# EAGLE board lightSensor (EAGLE 6.2)
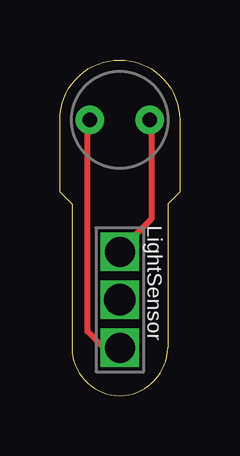
[diagram p0: board, top side]
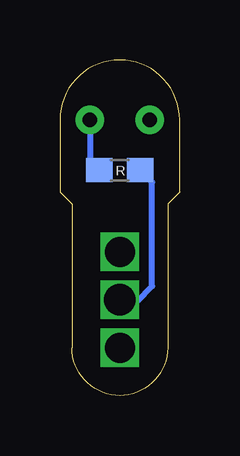
[diagram p1: board, bottom side, seen from below]

Size 5 x 14 mm. Coordinates in mm from the lower left corner, seen from the top.
Outline: 2.5,0 arc90 4.5,2 4.5,8 5,8.5 5,11.5 arc90 2.5,14 arc90 0,11.5 0,8.5 0.5,8 0.5,2 arc90 2.5,0
Copper layers (1*16): Top 0.035mm / dielectric 1.5mm / Bottom 0.035mm
Design rules: minimum track width 10mil, minimum drill 24mil, track to track 8mil, track to pad 8mil, pad to pad 8mil, via to via 8mil, smd to smd 8mil, copper to edge 40mil, drill to drill 8mil, minimum pad ring 5mil, minimum via ring 8mil, stop-mask expansion 4mil, vias tented up to drill 0mil, thermal gap 10mil

## Footprints (pad centres in the part's own frame; a part is rotated, then mirrored left to right if it is on the bottom)
LIGHTSENSOR = drill 0.6 pad 1.2: P$1 -1.25,0; P$2 1.25,0
SENSOR_HEADER = drill 1.25 pad 1.6 square: 1 0,2; 3 0,-2 | drill 1.3 pad 1.6 square: 2 0,0
0603 = smd 1.1 x 1: 1 -0.85,0; 2 0.85,0

## Placement (x,y rotation side)
E$1  [LIGHTSENSOR]  2.5,11.5 0 top
E$2  [SENSOR_HEADER]  2.5,4 0 top
R  [0603]  2.5,9.4 180 bottom

## Library data of the parts
E$1 E$2 = appessory
R = SparkFun

## Nets
S$2: E$1.P$2

## Tracks (layer width: path | path; a pad name or v marks a point on that pad's centre or on a via)
S$1
  Top 0.254: 2.55,2.03 1.79,2.03 1.15,2.67 1.15,11.56
S$2
  Bottom 0.254: E$1.P$2 3.75,9.5
S$3
  Bottom 0.254: 2.55,3.94 1.79,3.94 1.15,4.57 1.15,8.89 1.66,9.4
S$4
  Top 0.254: 3.82,11.56 3.82,7.37 2.42,5.97

## Text on the board
tPlace: LightSensor